# EAGLE board 4Bit Computer - 1 5LED Display (EAGLE 7.6.0)

Size 27 x 16.5 mm. Coordinates in mm from the lower left corner, seen from the top.
Outline: 0,0 27,0 27,16.5 0,16.5 0,0
Copper layers (1*16): Top 0.035mm / dielectric 1.5mm / Bottom 0.035mm
Design rules "default": minimum track width 10mil, minimum drill 24mil, track to track 8mil, track to pad 8mil, pad to pad 8mil, via to via 8mil, smd to smd 8mil, copper to edge 40mil, drill to drill 8mil, minimum pad ring 10mil, minimum via ring 8mil, stop-mask expansion 4mil, vias tented up to drill 0mil, thermal gap 10mil

## Footprints (pad centres in the part's own frame; a part is rotated, then mirrored left to right if it is on the bottom)
1X10-BIG = drill 1.016 pad 1.778 octagon: 1 -11.43,0; 2 -8.89,0; 3 -6.35,0; 4 -3.81,0; 5 -1.27,0; 6 1.27,0; 7 3.81,0; 8 6.35,0; 9 8.89,0; 10 11.43,0
1206 = smd 1.6 x 1.803: A -1.422,0; C 1.422,0
SIP10 = drill 0.6 long: 1 -11.46,0; 2 -8.92,0; 3 -6.38,0; 4 -3.84,0; 5 -1.3,0; 6 1.24,0; 7 3.78,0; 8 6.32,0; 9 8.86,0; 10 11.4,0

## Placement (x,y rotation side)
BITS_IN  PINHD-1X10  [1X10-BIG]  13.5,1.5 180 top
BITS_OUT  PINHD-1X10  [1X10-BIG]  13.5,15 180 top
LED_0  [1206]  24.5,7 90 top
LED_1  [1206]  22,7 90 top
LED_2  [1206]  19.5,7 90 top
LED_3  [1206]  17,7 90 top
LED_4  [1206]  14.5,7 90 top
RA  [SIP10]  13.6,11.5 0 top

## Library data of the parts
BITS_IN BITS_OUT LED_0 LED_1-LED_4 = adafruit
RA = resistor-sip

## Nets
GND: BITS_IN.10 BITS_OUT.10 RA.1
LED_0_IN: BITS_IN.1 BITS_OUT.1 LED_0.A
LED_1_IN: BITS_IN.2 BITS_OUT.2 LED_1.A
LED_2_IN: BITS_IN.3 BITS_OUT.3 LED_2.A
LED_3_IN: BITS_IN.4 BITS_OUT.4 LED_3.A
LED_4_IN: BITS_IN.5 BITS_OUT.5 LED_4.A
N$1: LED_0.C RA.9
N$2: LED_1.C RA.8
N$3: LED_2.C RA.7
N$4: LED_3.C RA.6
N$5: LED_4.C RA.5
PASS_THRU_5: BITS_IN.6 BITS_OUT.6
PASS_THRU_6: BITS_IN.7 BITS_OUT.7
PASS_THRU_7: BITS_IN.8 BITS_OUT.8
VCC: BITS_IN.9 BITS_OUT.9

## Tracks (layer width: path | path; a pad name or v marks a point on that pad's centre or on a via)
GND  (2 unrouted)
LED_0_IN  (2 unrouted)
LED_1_IN  (2 unrouted)
LED_2_IN  (2 unrouted)
LED_3_IN  (2 unrouted)
LED_4_IN  (2 unrouted)
N$1  (1 unrouted)
N$2  (1 unrouted)
N$3  (1 unrouted)
N$4  (1 unrouted)
N$5  (1 unrouted)
PASS_THRU_5  (1 unrouted)
PASS_THRU_6  (1 unrouted)
PASS_THRU_7  (1 unrouted)
VCC  (1 unrouted)

## Text on the board
tNames: GND | VCC | 4 | 3 | 2 | 1 | 0 | GND | + | GND | VCC | 4 | 3 | 2 | 1 | 0
bNames: 4 Bit Computer / 5 Bit LED Display | PCBv1 - 2017.06 | MadeInTheUSB.net